# Altium PCB NBP9 Altera Cyclone BGA456 Rev1.00.PcbDoc (part 3 of 3)
Units mm, origin at the board's own origin, x right, y up, seen from the top; angles counter-clockwise.
Board outline 69 x 80.99 mm, 6 copper layers (Top Layer, MidLayer1, InternalPlane1, InternalPlane2, MidLayer2, Bottom Layer); 105 components, 269 nets, 899 pads, 453 vias.
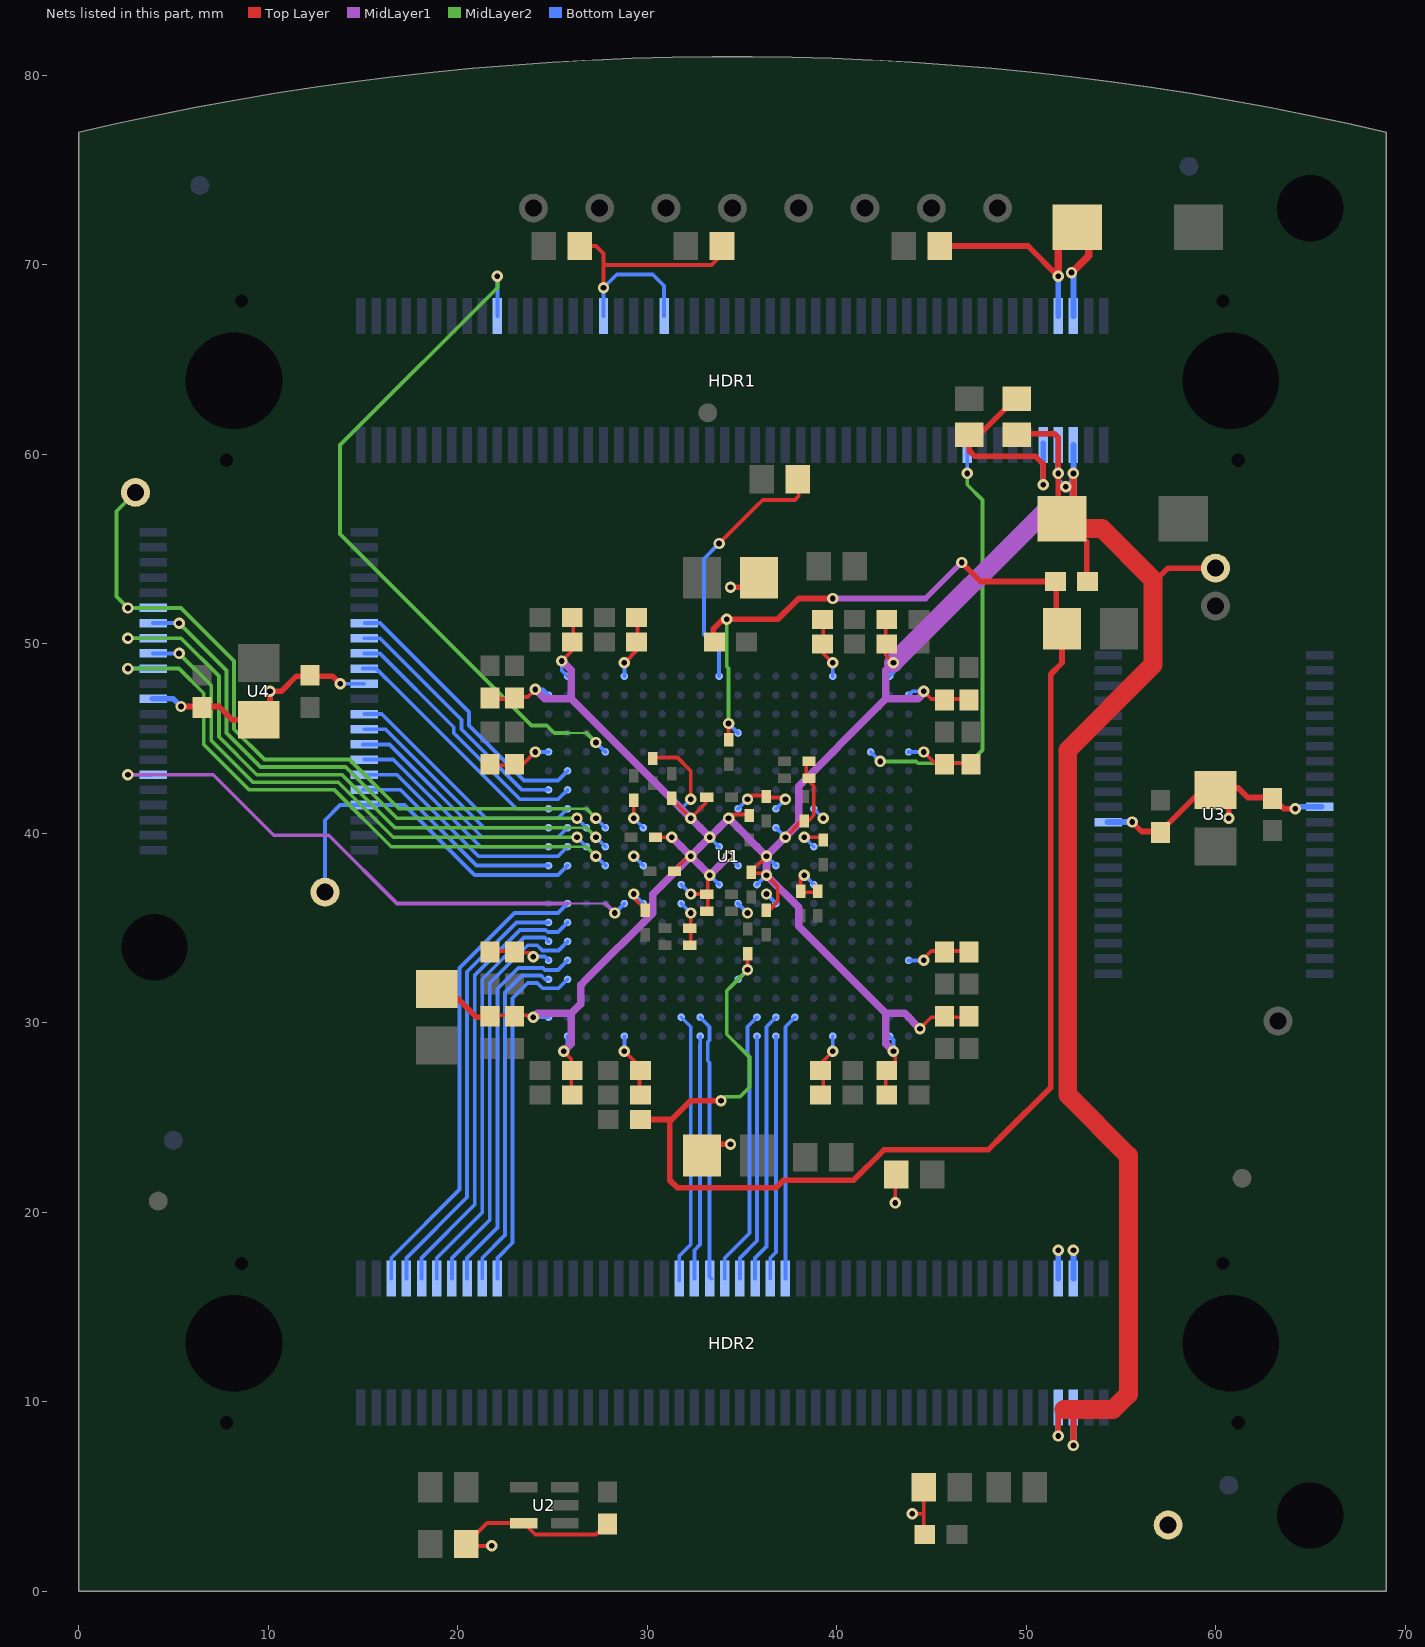
[diagram p7: the nets of this part, all layers, seen from the top]

## Via types
v1: diameter 0.6, hole 0.3, Top Layer to Bottom Layer, 453 vias

## Nets (pads, with @x,y where several pads share a name; then routed paths per layer and width w, separated by ;. In a path a pad name is that pad's centre, name@x,y a point inside that pad or via, vN(x,y) a via of type N, cw(c..) or ccw(c..) an arc to the next point about the centre after c; other vN are vias at no path point) (continued)
SRAM1_D4: U1.U10 U4.13 | length 32.4
  MidLayer2 w0.127: 25.8,39.3 26.8,39.3
  MidLayer2 w0.2: v1(2.6,48.7) 5.3,48.7 6.6,47.4 6.6,44.7 9,42.3 13.5,42.3 16.5,39.3 25.8,39.3 ; 26.8,39.3 v1(27.3,38.8)
  Bottom Layer w0.2: v1(2.6,48.7) U4.13@3.925,48.7 ; v1(27.3,38.8) U1.U10@27.8,38.3
SRAM1_D5: U1.V11 U4.14 | length 28.8
  MidLayer2 w0.2: v1(5.3,49.5) 7,47.8 7,44.9 9.2,42.7 13.7,42.7 16.6,39.8 v1(26.3,39.8)
  Bottom Layer w0.2: U4.14@3.925,49.5 v1(5.3,49.5) ; v1(26.3,39.8) U1.V11@26.8,39.3
SRAM1_D6: U1.U11 U4.15 | length 33.2
  MidLayer2 w0.127: 25.8,40.3 26.8,40.3
  MidLayer2 w0.2: v1(2.6,50.3) 5.4,50.3 7.4,48.3 7.4,45.1 9.4,43.1 13.9,43.1 16.7,40.3 25.8,40.3 ; 26.8,40.3 v1(27.3,39.8)
  Bottom Layer w0.2: v1(2.6,50.3) U4.15@3.9,50.3 ; v1@27.5,39.6 v1(27.3,39.8) U1.U11@27.8,39.3
SRAM1_D7: U1.V12 U4.16 | length 29.6
  MidLayer2 w0.2: v1(5.3,51.1) 7.8,48.6 7.8,45.3 9.6,43.5 14.1,43.5 16.8,40.8 v1(26.3,40.8)
  Bottom Layer w0.2: U4.16@3.925,51.1 v1(5.3,51.1) ; v1@26.5,40.6 v1(26.3,40.8) U1.V12@26.8,40.3
SRAM1_D8: U1.W15 U4.29 | length 14.8
  Bottom Layer w0.2: U4.29@15.1,51.1 15.9,51.1 20.6,46.4 20.6,45.7 23.5,42.8 25.3,42.8 U1.W15@25.8,43.3
SRAM1_D9: U1.Y14 U4.30 | length 13.3
  Bottom Layer w0.2: U4.30@15.075,50.3 15.9,50.3 20.2,46 20.2,45.5 23.4,42.3 24.375,42.3 ; 24.4,42.3 U1.Y14@24.8,42.3
SRAM1_D10: U1.W14 U4.31 | length 14.3
  Bottom Layer w0.2: U4.31@15.075,49.5 15.9,49.5 19.8,45.6 19.8,45.3 23.3,41.8 25.3,41.8 U1.W14@25.8,42.3
SRAM1_D11: U1.Y13 U4.32 | length 12.8
  Bottom Layer w0.2: U4.32@15,48.7 15.7,48.7 16.9,47.5 23.1,41.3 24.375,41.3 ; 24.4,41.3 U1.Y13@24.8,41.3
SRAM1_D12: U1.W13 U4.35 | length 13.2
  Bottom Layer w0.2: U4.35@15.075,46.3 16,46.3 21,41.3 21.5,40.8 25.3,40.8 25.499,41 U1.W13@25.8,41.3
SRAM1_D13: U1.Y12 U4.36 | length 11.9
  Bottom Layer w0.2: U4.36@15.075,45.5 16.2,45.5 21.4,40.3 24.375,40.3 ; 24.4,40.3 U1.Y12@24.8,40.3
SRAM1_D14: U1.W12 U4.37 | length 13
  Bottom Layer w0.2: U4.37@15,44.7 16.4,44.7 21.3,39.8 25.3,39.8 U1.W12@25.8,40.3
SRAM1_D15: U1.Y11 U4.38 | length 11.6
  Bottom Layer w0.2: U4.38@15.075,43.9 16.6,43.9 21.2,39.3 U1.Y11@24.8,39.3
SRAM1_E: U1.T8 U4.6 | length 30.7
  MidLayer1 w0.127: 25.8,36.3 27.8,36.3
  MidLayer1 w0.2: v1(2.6,43.1) 7.1,43.1 10.3,39.9 13.2,39.9 16.8,36.3 25.8,36.3 ; 27.8,36.3 v1(28.3,35.8)
  Bottom Layer w0.2: v1(2.6,43.1) U4.6@3.9,43.1 ; v1(28.3,35.8) U1.T8@28.8,36.3
SRAM1_LB: U1.W11 U4.39 | length 12.7
  Bottom Layer w0.2: U4.39@15.075,43.1 16.8,43.1 21.1,38.8 25.3,38.8 U1.W11@25.8,39.3
SRAM1_OE: TP2.1 U1.W10 U4.41 | length 18.7
  Bottom Layer w0.2: TP2.1@13,36.9 13,40.7 13.8,41.5 17.2,41.5 20.9,37.8 25.3,37.8 U1.W10@25.8,38.3
SRAM1_UB: U1.Y10 U4.40 | length 11.4
  Bottom Layer w0.2: U4.40@15,42.3 17,42.3 21,38.3 24.375,38.3 ; 24.4,38.3 U1.Y10@24.8,38.3
SRAM1_W: TP5.1 U1.U12 U4.17 | length 40.5
  MidLayer2 w0.127: 25.8,41.3 26.8,41.3
  MidLayer2 w0.2: TP5.1@3,58 2,57 2,52.5 v1(2.6,51.9) 5.4,51.9 8.2,49.1 8.2,45.5 9.8,43.9 14.3,43.9 16.9,41.3 25.8,41.3 ; 26.8,41.3 v1(27.3,40.8)
  Bottom Layer w0.2: v1(2.6,51.9) U4.17@3.9,51.9 ; v1@27.5,40.6 v1(27.3,40.8) U1.U12@27.8,40.3
SW0: HDR2.44 U1.N2 | length 14.4
  Bottom Layer w0.2: HDR2.44@31.7,16.4 31.7,17.7 32.3,18.3 32.3,29.8 U1.N2@31.8,30.3
SW1: HDR2.46 U1.M1 | length 13
  Bottom Layer w0.2: HDR2.46@32.5,16.5 32.5,18 32.8,18.3 32.8,28.875 ; 32.8,28.8 U1.M1@32.8,29.3
SW2: HDR2.48 U1.M2 | length 14.1
  Bottom Layer w0.2: U1.M2@32.8,30.3 33.3,29.8 33.3,29.1 33.2,29 33.2,28 33.3,27.9 33.3,16.6 33.35,16.55 HDR2.48@33.4,16.5
SW3: HDR2.50 U1.J2 | length 14.6
  Bottom Layer w0.2: HDR2.50@34.1,16.5 34.1,17.6 35.4,18.9 35.4,28.2 35.3,28.3 35.3,29.8 U1.J2@35.8,30.3
SW4: HDR2.52 U1.J1 | length 13.1
  Bottom Layer w0.2: HDR2.52@34.9,16.5 34.9,17.6 35.8,18.5 35.8,28.875 ; 35.8,28.9 U1.J1@35.8,29.3
SW5: HDR2.54 U1.H2 | length 14.3
  Bottom Layer w0.2: HDR2.54@35.7,16.5 35.7,17.6 36.3,18.2 36.3,29.8 U1.H2@36.8,30.3
SW6: HDR2.56 U1.H1 | length 13
  Bottom Layer w0.2: HDR2.56@36.5,16.5 36.5,17.6 36.8,17.9 36.8,28.875 ; 36.8,28.8 U1.H1@36.8,29.3
SW7: HDR2.58 U1.G2 | length 14
  Bottom Layer w0.2: HDR2.58@37.3,16.5 37.3,17.6 37.3,29.8 U1.G2@37.8,30.3
SWC0: HDR2.18 U1.Y4 | length 18.4
  Bottom Layer w0.2: HDR2.18@21.3,16.5 21.3,17.6 22.5,18.8 22.5,31.6 23.4,32.5 24.4,32.5 24.6,32.3 U1.Y4@24.8,32.3
SWC1: HDR2.16 U1.W5 | length 20.4
  Bottom Layer w0.2: HDR2.16@20.5,16.5 20.5,17.6 22.1,19.2 22.1,31.8 23.2,32.9 24.5,32.9 24.6,32.8 25.3,32.8 U1.W5@25.8,33.3
SWC2: HDR2.14 U1.W6 | length 21.7
  Bottom Layer w0.2: HDR2.14@19.7,16.5 19.7,17.6 21.7,19.6 21.7,32.1 23.7,34.1 24.2,34.1 24.475,33.825 25.325,33.825 U1.W6@25.8,34.3
SWC3: HDR2.6 U1.W8 | length 25
  Bottom Layer w0.2: HDR2.6@16.5,16.5 16.5,17.6 20.1,21.2 20.1,32.9 23,35.8 25.3,35.8 U1.W8@25.8,36.3
SWR0: HDR2.20 U1.W4 | length 18.7
  Bottom Layer w0.2: HDR2.20@22.1,16.5 22.1,17.6 22.9,18.4 22.9,31.3 23.7,32.1 24.2,32.1 24.475,31.825 25.325,31.825 U1.W4@25.8,32.3
SWR1: HDR2.12 U1.Y6 | length 21.3
  Bottom Layer w0.2: HDR2.12@18.9,16.5 18.9,17.6 21.3,20 21.3,32.3 23.5,34.5 24.6,34.5 U1.Y6@24.8,34.3
SWR2: HDR2.10 U1.W7 | length 23.3
  Bottom Layer w0.2: HDR2.10@18.1,16.5 18.1,17.6 20.9,20.4 20.9,32.5 23.3,34.9 24.656,34.9 24.756,34.8 25.3,34.8 U1.W7@25.8,35.3
SWR3: HDR2.8 U1.Y7 | length 22.9
  Bottom Layer w0.2: HDR2.8@17.3,16.5 17.3,17.6 20.5,20.8 20.5,32.7 23.1,35.3 24.375,35.3 ; 24.4,35.3 U1.Y7@24.8,35.3
TDO: R7.2 U1.L20 | length 15.7
  Top Layer w0.2: 35,56.5 v1(33.8,55.3) 35.7,57.2 36.1,57.6 37.8,57.6 38,57.8 R7.2@38,58.8
  Bottom Layer w0.2: U1.L20@33.8,48.3 33.8,49.7 33,50.5 33,54.5 v1(33.8,55.3) v1@33.8,55.4
TEST: HDR1.81 U1.C16 | length 23.2
  MidLayer2 w0.2: v1(42.3,43.8) 44.2,43.8 44.3,43.7 47,43.7 47.7,44.4 47.7,57.6 46.9,58.4 v1(46.9,59)
  Bottom Layer w0.2: U1.C16@41.8,44.3 v1(42.3,43.8) v1@42.101,43.999 ; v1(46.9,59) HDR1.81@46.9,60.5
VCC: C2.1 C3.1 C4.1 C5.1 C9.1 C10.1 C11.1 C12.1 C13.1 C14.1 C15.1 C16.1 C17.2 C28.1 C29.1 C30.1 C31.1 C32.1 C33.1 C34.1 C35.1 C36.1 C37.1 C38.1 C39.1 C40.1 C41.1 C42.1 C43.1 C44.1 C45.1 C46.1 C47.1 C48.1 C49.1 C51.1 HDR1.34 HDR1.42 HDR1.94 HDR1.96 HDR2.94 HDR2.96 R1.1 R2.1 R3.1 R10.1 R11.2 R12.2 TP3.1 U1.A5 U1.A16 U1.E1 U1.E20 U1.F9 U1.F11 U1.F13 U1.H8 U1.H13 U1.K8 U1.K13 U1.N8 U1.N13 U1.R8 U1.R10 U1.R12 U1.T1 U1.T20 U1.Y5 U1.Y16 U2.5 U3.11 U3.33 U4.11 U4.33 | length 133.1
  Top Layer w0.2: R11.2@20.45,2.5 21.55,3.6 U2.5@23.5,3.6 24.1,3 27.3,3 C17.2@27.9,3.6 ; R11.2@20.5,2.4 v1(21.8,2.4) ; C9.1@21.7,33.8 C34.1@23,33.8 ; C32.1@21.7,43.7 21.8,43.6 23,43.6 23.4,43.6 v1(24.1,44.3) ; C34.1@23,33.7 23.8,33.7 v1(24,33.5) ; R3.1@26.4,71 27.3,71 27.7,70.6 v1(27.7,68.8) ; 27.7,70 33.4,70 33.9,70.5 R2.1@33.9,71.1 ; v1@28.7,28.4 v1(28.8,28.5) 29.7,27.6 C41.1@29.7,27.5 ; v1@28.7,49.1 v1(28.8,49) 29.5,49.7 29.5,51.3 C15.1@29.2,51.6 ; v1(29.3,36.8) 29.3,36.6 C30.1@29.9,36 ; v1(29.3,40.8) C38.1@29.3,41.8 ; C37.1@29.6,26.2 C41.1@29.6,27.6 ; C31.1@30.2,44 31.6,44 32.3,43.3 v1(32.3,41.8) ; C13.1@32.3,34.1 v1(32.3,35.8) ; v1(35.3,41.8) 35.5,42 C36.1@36.3,42 ; C2.1@35.9,53.6 C2.1@36,53.6 ; C36.1@36.3,41.9 37.2,41.9 v1(37.3,41.8) ; v1(38.3,39.8) C44.1@39.3,39.8 ; v1@38.4,37.7 v1(38.3,37.8) 38.1,37.6 38.1,36.9 C47.1@39,36.9 ; C16.1@39.3,26.2 39.3,27.3 39.2,27.4 39.2,27.9 v1(39.8,28.5) v1@39.9,28.4 ; C33.1@39.3,50 39.3,49.5 v1(39.8,49) ; C33.1@39.3,50.1 C14.1@39.3,51.3 ; v1(43.1,20.5) R12.2@43.1,22 ; v1(44,4.1) 44.6,4.1 ; v1@44.5,33.3 45,33.8 C43.1@47,33.8 ; C29.1@44.6,2.9 R10.1@44.6,5.5 ; v1(44.6,44.3) 45.2,43.7 45.7,43.7 C11.1@47.1,43.7
  Top Layer w0.3: v1(5.4,46.7) 7.4,46.7 8.1,46 C4.1@9.5,46 10.1,46.6 v1(10.1,47.5) 10.7,47.5 11.5,48.3 13.4,48.3 v1(13.8,47.9) ; C3.1@32.8,23.6 v1(34.4,23.6) ; v1(34.4,53) 35.4,53 C2.1@35.9,53.5 ; R1.1@45.4,71 50.1,71 v1(51.7,69.4) ; v1(55.6,40.6) 56.1,40.1 57.1,40.1 59.4,42.4 61.2,42.4 61.7,41.9 63,41.9 63.6,41.3 v1(64.2,41.3) ; C5.1@60,42.4 60.7,41.7 v1(60.7,40.8)
  Top Layer w0.4: v1(51.7,69.4) 51.7,71.8 51.9,72 C51.1@53.3,72 ; v1(52.4,69.6) 53.3,70.5 C51.1@53.3,71.9
  Bottom Layer w0.2: v1(13.8,47.9) U4.33@15.075,47.9 ; v1(24,33.5) 24.6,33.5 U1.Y5@24.8,33.3 ; v1(24.1,44.3) U1.Y16@24.8,44.3 ; HDR1.34@27.7,67.3 v1(27.7,68.8) 28.4,69.5 30.3,69.5 30.9,68.9 HDR1.42@30.9,67.3 ; v1@28.8,28.6 U1.T1@28.8,29.3 ; U1.T20@28.8,48.3 v1(28.8,49) ; v1(29.3,36.8) U1.R8@29.8,36.3 ; v1(29.3,38.8) U1.R10@29.8,38.3 ; v1(29.3,40.8) U1.R12@29.8,40.3 ; U1.N8@31.8,36.3 v1(32.3,35.8) ; U1.N13@31.8,41.3 v1(32.3,41.8) ; U1.K13@34.8,41.3 v1(35.3,41.8) ; U1.K8@34.8,36.3 v1(35.3,35.8) ; v1(36.3,36.8) U1.H8@36.8,36.3 ; U1.H13@36.8,41.3 v1(37.3,41.8) ; v1(38.3,37.8) U1.F9@38.8,37.3 ; v1(38.3,39.8) U1.F11@38.8,39.3 ; U1.F13@38.8,41.3 v1(39.3,40.8) ; v1@39.8,28.6 U1.E1@39.8,29.3 ; U1.E20@39.8,48.3 v1(39.8,49) ; U1.A5@43.8,33.3 v1@44.5,33.3 ; U1.A16@43.8,44.3 v1(44.6,44.3)
  Bottom Layer w0.3: U4.11@3.9,47.1 5,47.1 v1(5.4,46.7) ; HDR2.94@51.7,16.5 v1(51.7,18) ; HDR1.94@51.7,67.3 v1(51.7,69.4) ; v1@52.4,69.5 v1(52.4,69.6) ; HDR2.96@52.5,16.5 v1(52.5,18) ; HDR1.96@52.5,67.3 v1@52.5,69.5 ; U3.11@54.3,40.6 v1(55.6,40.6) ; v1(64.2,41.3) 64.3,41.4 U3.33@65.6,41.4
  other v1: 44.6,33.3 51.7,69.4
VCCA_PLL1: C6.1 C52.1 C53.1 C54.1 C55.1 L1.2 U1.K4 U1.K17 | length 95.6
  Top Layer w0.2: C54.1@34.3,45 v1(34.3,45.8) ; v1(35.3,32.8) C55.1@35.3,33.6
  Top Layer w0.3: C53.1@29.65,24.9 31.3,24.9 ; C52.1@33.5,50 33.5,50.8 34,51.3 36.9,51.3 38,52.4 v1(39.8,52.4) ; v1(33.9,25.9) 32.3,25.9 31.2,24.8 31.2,21.7 31.6,21.3 36.8,21.3 37.2,21.7 40.9,21.7 42.5,23.3 48,23.3 48.8,24.1 51.3,26.6 51.3,48.4 51.9,49 C6.1@51.9,50.8 ; v1(46.6,54.3) 47.6,53.3 51.6,53.3 51.6,51.3 C6.1@52,50.9
  MidLayer1 w0.3: v1(39.8,52.4) 44.7,52.4 v1(46.6,54.3)
  MidLayer2 w0.2: v1(33.9,25.9) 34.1,26.1 34.9,26.1 35.4,26.6 35.4,28.2 34.2,29.4 34.2,31.7 34.4,31.9 v1(35.3,32.8) ; v1(34.2,51.3) 34.2,50.7 34.2,48.8 34.3,48.7 v1(34.3,45.8)
  Bottom Layer w0.2: v1(34.3,45.8) U1.K17@34.8,45.3 ; U1.K4@34.8,32.3 v1(35.3,32.8)
VCCINT: C1.1 C7.1 C8.1 C18.1 C19.1 C20.1 C21.1 C22.1 C23.1 C24.1 C25.1 C26.1 C27.1 C50.1 C56.1 C57.1 C58.1 C59.1 C60.1 C61.1 C62.1 C63.1 C64.1 C65.1 C66.1 C67.1 C68.1 C69.1 C70.1 C71.1 HDR1.93 HDR1.95 HDR2.93 HDR2.95 L1.1 R8.1 TP6.1 U1.A2 U1.A19 U1.B1 U1.B20 U1.H10 U1.H12 U1.J9 U1.J11 U1.K10 U1.K12 U1.L9 U1.L11 U1.M10 U1.M12 U1.N9 U1.N11 U1.W1 U1.W20 U1.Y2 U1.Y19 | length 224.5
  Top Layer w0.2: C63.1@21.7,30.4 23.9,30.4 v1(24,30.3) ; C58.1@21.7,47.2 21.8,47.1 C67.1@23,47.1 ; C67.1@23,47.2 23.7,47.2 v1(24.1,47.6) ; v1(25.5,49.1) 26.1,49.7 26.1,51.3 C59.1@25.9,51.5 ; v1(25.6,28.5) 26,28.1 C57.1@26,26.3 ; C21.1@30.4,39.8 v1(31.3,39.8) ; C8.1@31.3,41.9 31.3,41.8 v1(32.3,40.8) 33.1,41.6 C24.1@33.1,41.8 ; C27.1@31.4,38 32.2,38.8 v1(32.3,38.8) ; v1(32.3,36.8) C7.1@33.2,36.8 ; C23.1@33.2,35.9 C7.1@33.2,36.8 ; v1(33.3,37.8) 33.2,37.7 C7.1@33.2,36.8 ; v1(34.3,40.8) 34.5,41 C20.1@35.3,41 ; C26.1@35.5,37.9 36.2,37.9 v1(36.3,37.8) 36.9,37.2 36.9,36.4 36.4,35.9 C22.1@36.3,35.9 ; C26.1@35.5,38 v1(36.3,38.8) ; v1(37.3,39.8) 38.1,40.6 C18.1@38.3,40.6 ; C18.1@38.2,40.7 38.54,40.7 38.8,40.96 38.8,42.5 38.4,42.9 C19.1@38.4,43.8 ; C62.1@42.6,26.2 C65.1@42.6,27.6 ; C56.1@42.7,51.4 42.6,51.3 42.6,49.4 v1(43,49) ; v1(43,28.5) 43.1,28.4 C65.1@43.1,27.5 ; v1(44.4,29.7) 45,30.3 C61.1@47,30.3 ; v1(44.6,47.5) 45,47.1 C60.1@47,47.1
  Top Layer w0.3: C1.1@18.9,31.8 19.5,31.8 21,30.3 C63.1@21.7,30.3 ; R8.1@49.5,61.1 51.5,61.1 51.7,60.9 C50.1@51.7,56.6 ; v1(51.7,8.2) 51.7,9.6 ; v1(52.5,7.7) 52.5,9.6 ; C50.1@52.5,57.2 v1(52.5,59) ; L1.1@53.2,53.3 53.2,55.4 ; 56.6,53.1 57.5,54 TP6.1@60,54
  Top Layer w1: C50.1@51.9,56.1 54,56.1 56.7,53.4 56.7,48.9 52.2,44.4 52.2,26.2 55.4,23 55.4,13.8 ; 52,9.6 54.6,9.6 55.4,10.4 55.4,14
  MidLayer1 w0.2: 51.7,58.7 v1(51.7,59)
  MidLayer1 w0.4: v1(24,30.3) 24.2,30.5 26,30.5 ; v1(24.1,47.6) 24.6,47.1 26,47.1 ; v1(25.5,49.1) 26,48.6 26,47.1 ; v1(25.6,28.5) 26,28.9 26,30.5 ; v1(31.3,39.8) v1(32.3,38.8) ; v1(34.3,38.8) v1(33.3,37.8) v1(32.3,38.8) ; v1(43,28.5) 42.6,28.9 42.6,30.5 ; v1(43,49) 42.6,48.6 42.6,47.1 ; v1(44.4,29.7) 43.6,30.5 42.6,30.5 ; v1@44.65,47.45 44.3,47.1 42.6,47.1 ; 52.5,57.3 v1(52.5,59) ; 26,30.5 26.5,31 26.5,32 26.8,32.3 30.3,35.8 30.3,36.8 v1(32.3,38.8) ; 26,47.1 v1(33.3,39.8) ; v1(32.3,38.8) v1(33.3,39.8) ; v1(33.3,39.8) v1(34.3,40.8) v1(36.3,38.8) ; v1(36.3,38.8) v1(36.3,37.8) 38,36.1 38,35.1 42.6,30.5 ; v1(36.3,38.8) v1(37.3,39.8) 38,40.5 38,42.5 42.2,46.7 42.6,47.1
  MidLayer1 w1: v1(43,49) 51.3,57.3 52.5,57.3
  Bottom Layer w0.2: v1(24,30.3) U1.Y2@24.8,30.3 ; v1(24.1,47.6) 24.5,47.6 U1.Y19@24.8,47.3 ; v1(25.5,49.1) 25.5,48.6 U1.W20@25.8,48.3 ; v1@25.65,28.45 25.8,28.6 U1.W1@25.8,29.3 ; v1(31.3,39.8) U1.N11@31.8,39.3 ; U1.N9@31.8,37.3 v1(32.3,36.8) ; v1(32.3,38.8) U1.M10@32.8,38.3 ; v1(32.3,40.8) U1.M12@32.8,40.3 ; v1(33.3,37.8) U1.L9@33.8,37.3 ; v1(33.3,39.8) U1.L11@33.8,39.3 ; v1(34.3,38.8) U1.K10@34.8,38.3 ; v1(34.3,40.8) U1.K12@34.8,40.3 ; U1.J9@35.8,37.3 v1(36.3,37.8) ; U1.J11@35.8,39.3 v1(36.3,38.8) U1.H10@36.8,38.3 ; U1.H12@36.8,40.3 v1(37.3,39.8) ; U1.B1@42.8,29.3 43,29.1 v1(43,28.5) ; U1.B20@42.8,48.3 43,48.5 v1(43,49) ; U1.A2@43.8,30.3 v1(44.4,29.7) ; U1.A19@43.8,47.3 44,47.5 v1(44.6,47.5) ; v1(51.7,59) 51.7,58.7 v1(52.1,58.3) 52.5,58.7 v1(52.5,59)
  Bottom Layer w0.3: v1(51.7,8.2) HDR2.93@51.7,9.7 ; v1(51.7,59) HDR1.93@51.7,60.5 ; v1(52.5,7.7) HDR2.95@52.5,9.7 ; v1(52.5,59) HDR1.95@52.5,60.5
VDRIVE: HDR1.20 U1.U16 | length 38.2
  MidLayer2 w0.127: 25.8,45.3 26.8,45.3
  MidLayer2 w0.2: v1(22.1,69.4) 22.1,68.8 14.3,61 13.8,60.5 13.8,55.8 23.9,45.7 24.7,45.7 25.1,45.3 25.8,45.3 ; 26.8,45.3 v1(27.3,44.8)
  Bottom Layer w0.2: HDR1.20@22.1,67.3 v1(22.1,69.4) ; v1@27.5,44.6 v1(27.3,44.8) U1.U16@27.8,44.3
VREF: HDR1.91 R8.2 R9.1 | length 11.7
  Top Layer w0.3: R8.2@49.5,63 49.475,62.975 47.6,61.1 47,61.1 47,60.2 47.3,59.9 50.5,59.9 50.9,59.5 v1(50.9,58.4)
  Bottom Layer w0.3: v1(50.9,58.4) HDR1.91@50.9,60.6
pads on no net: HDR1.MH1 HDR1.MH2 HDR1.MH3 HDR1.MH4 HDR1.MH5 HDR1.MH6 HDR2.MH1 HDR2.MH2 HDR2.MH3 HDR2.MH4 HDR2.MH5 HDR2.MH6 U1.B3 U1.C4 U1.C6 U1.D3 U1.D17 U1.D18 U1.E12 U1.E16 U1.F6 U1.F8 U1.F10 U1.F12 U1.F14 U1.F15 U1.G7 U1.G14 U1.G15 U1.H7 U1.H14 U1.H15 U1.J6 U1.J7 U1.J8 U1.J13 U1.J14 U1.J16 U1.K2 U1.K15 U1.K16 U1.K19 U1.L2 U1.L4 U1.L8 U1.L13 U1.M6 U1.M7 U1.M8 U1.M13 U1.M14 U1.M15 U1.N6 U1.N7 U1.N14 U1.N15 U1.P6 U1.P7 U1.P14 U1.P15 U1.P16 U1.R7 U1.R9 U1.R11 U1.R13 U1.R14 U1.R15 U1.R16 U1.V14 U2.1

## Polygon pours and split planes (outlines as drawn)
GND on Top Layer "Top Layer-GND" (solid, remove dead copper, pour order 1000): 0,0 0,82.9 69,82.9 69,0
VCCINT on MidLayer1 "MidLayer1-VCCINT" (solid, remove dead copper, pour order 1001): 0,0 0,82.7 69,82.7 69,0.1 0,0.1
VCC on MidLayer2 "MidLayer2-VCC" (solid, remove dead copper, pour order 1002): 0,0 0,83.4 69,83.4 69,0
GND on Bottom Layer "Bottom Layer-GND" (solid, remove dead copper, pour order 1003): 0,0 0,83.2 69,83.2 69,0
VCC on InternalPlane1 (split plane): 36.232,80.189 37.965,80.159 39.696,80.109 41.427,80.039 43.158,79.949 44.887,79.839 46.614,79.709 48.34,79.559 50.064,79.389 51.786,79.2 53.506,78.99 55.223,78.761 56.938,78.511 58.649,78.242 60.358,77.953 62.062,77.645 63.763,77.317 65.461,76.969 67.154,76.602 68.197,76.363 68.197,0.803 0.803,0.803 0.803,76.363 1.846,76.602 3.539,76.969 5.237,77.317 6.938,77.645 8.642,77.953 10.351,78.242 12.062,78.511 13.777,78.761 15.494,78.99 17.214,79.2 18.936,79.389 20.66,79.559 22.386,79.709 24.113,79.839 25.842,79.949 27.573,80.039 29.304,80.109 31.035,80.159 32.768,80.189 34.5,80.199
GND on InternalPlane2 (split plane): 36.232,80.189 37.965,80.159 39.696,80.109 41.427,80.039 43.158,79.949 44.887,79.839 46.614,79.709 48.34,79.559 50.064,79.389 51.786,79.2 53.506,78.99 55.223,78.761 56.938,78.511 58.649,78.242 60.358,77.953 62.062,77.645 63.763,77.317 65.461,76.969 67.154,76.602 68.197,76.363 68.197,0.803 0.803,0.803 0.803,76.363 1.846,76.602 3.539,76.969 5.237,77.317 6.938,77.645 8.642,77.953 10.351,78.242 12.062,78.511 13.777,78.761 15.494,78.99 17.214,79.2 18.936,79.389 20.66,79.559 22.386,79.709 24.113,79.839 25.842,79.949 27.573,80.039 29.304,80.109 31.035,80.159 32.768,80.189 34.5,80.199

## Keep-outs
Top Layer:
  circle w0.254: c4.2,20.6 r2.5
  circle w0.254: c33.2,62.2 r2.5
  circle w0.254: c61.4,21.8 r2.5
Bottom Layer:
  circle w0.254: c5,23.8 r2.5
  circle w0.254: c58.6,75.2 r2.5
  circle w0.254: c6.4,74.2 r2.5
  circle w0.254: c60.7,5.6 r2.5
Keep-Out Layer:
  the board outline again, w1.8

## Silkscreen, mask and mechanical layers (free items; w line width, h text height)
Top Overlay:
  circle w0.127: c4,34 r2.5
  circle w0.127: c65,4 r2.5
  circle w0.127: c65,73 r2.5
  lines w0.08: 20,27.1 21.4,28 ; 21.5,50.5 23,49.6 ; 22.7,27.4 22.7,28 ; 22.7,51.8 23.7,50.4 ; 23.2,25.4 23.6,25.8 23.6,27.6 23.8,27.6 ; 25.5,37.3 32.4,37.3 ; 26.1,38.3 29.7,38 ; 26.1,39.4 28.5,39.4 28.8,39.6 ; 26.2,42.3 29.1,42.3 ; 29.8,30.7 29.8,34.2 ; 29.9,23.2 29.9,24.3 ; 30.8,30.6 30.7,33.4 31.6,33.9 31.6,35.4 32.1,35.8 ; 31.8,30.6 31.8,33.8 31.9,33.9 ; 33,42.5 33.2,42.2 ; 33.1,35 33.7,34.6 33.7,30 ; 33.2,46.9 33.8,45.9 ; 33.2,51.3 33.8,50.7 ; 34.8,46.9 34.9,41.6 35.2,41.2 ; 35.6,33.8 35.8,33.7 35.8,30.6 ; 35.8,46.9 35.8,42.6 36,42.2 ; 36.5,35.5 37.4,35.2 ; 38.1,36.6 38.2,36.3 42.5,36.2 ; 38.5,41.3 42.6,41.3 ; 39.4,37.2 42.5,37.4 ; 39.5,43 39.9,43.3 42.5,43.3 ; 39.6,39.3 42.6,39.3 ; 44.9,50 46.6,51.1 ; 45,27.4 45.9,26.6 ; 45.7,49.6 46.2,50 47.4,50.2 ; 45.9,28 47.1,27.4 ; 46.1,63.4 46.1,64 ; 55.8,74.4 55.82,75.12 ; 57.9,2.6 58.8,1.7 61.5,1.7
  lines w0.127: 0,1.5 1.5,1.5 1.5,0 ; 0,22.3 1.5,22.3 1.5,23.4 0,23.4 ; 0.001,53.6 1.501,53.6 1.501,54.7 0.001,54.7 ; 0,75.5 1.5,75.5 1.5,77.3 ; 15.7,79.8 15.7,78.1 17,78.1 17,79.9 ; 49.7,80.2 49.7,78.7 51,78.7 51,80.1 ; 67.5,0 67.5,1.5 69,1.5 ; 67.5,77.3 67.5,75.5 69,75.5 ; 68.999,22.3 67.5,22.3 67.5,23.4 69,23.4
Bottom Overlay:
  drawing of 856 lines, arcs and shapes, not listed
  text "REV 1.00" at 47.8,76.5 h1.3
  text "NBP9" at 54.5,76.5 h1.3
  text "TP10" at 25.3,71.2 h0.8
  text "TP12" at 28.9,71.2 h0.8
  text "TP9" at 31.9,71.2 h0.8
  text "TP8" at 35.5,71.2 h0.8
  text "TP7" at 39.1,71.2 h0.8
  text "TP14" at 42.8,71.2 h0.8
  text "TP13" at 46.5,71.2 h0.8
  text "TP11" at 49.8,71.2 h0.8
  text "TP5" at 4.1,59.1 h0.8
  text "1" at 14.4,58.4 h1
  text "TP6" at 63.4,53.6 h0.8
  text "TP4" at 59,51.6 h0.8
  text "TP2" at 14.2,34.9 h0.8
  text "TP1" at 62.1,29.7 h0.8
  text "1" at 14.224,7.62 h1
  text "TP3" at 55.9,3.1 h0.8
PCB Boundary:
  the board outline again, w0.25
  text "PCB boundary coincides with centre-line of tracks and arc" at 0,-12 h0.75
Gerber ID:
  text ".Layer_Name" at 0,-6 h0.75
Printout ID:
  text ".Printout_Name" at 0,-10 h0.75
Design Information:
  drawing of 719 lines, arcs and shapes, not listed
  text "NBP9 REV 1.00" at 317.627,202.041 h1.27
  text "DESIGN INFORMATION" at 261.62,201.914 h1.52
  text "BOARD NAME:" at 299.212,201.914 h1.52
  text "BOARD TECHNOLOGY" at 261.62,199.374 h1.52
  text "BOARD SIZE (REFER ALSO PROFILING INFORMATION)" at 309.88,199.374 h1.27
  text "69.00mm" at 312.6,197.1 h1.52
  text "15.748" at 277.419,197.012 h1.52
  text "81.00mm" at 335.6,197 h1.52
  text "5.000" at 291.389,196.885 h1.52
  text "5" at 266.446,196.834 h1.52
  text "X" at 328.549,196.326 h1.78
  text "(MIN. TRACK/   PADS  /   CLEARANCE     IN 0.001'')" at 260.096,194.294 h1.27
  text "MINIMUM ANNULAR RING 0.05MM (0.002'') EXTERNAL PER IPC-2221 CLASS 3 LEVEL C AND IS THE" at 261.62,191.754 h1.27
  text "MANUFACTURING REGISTRATION ALLOWANCE" at 261.62,189.468 h1.27
  text "LAND SIZE CALCULATION MINIMUM - NOMINAL HOLE SIZE + 0.508MM (0.020'')" at 261.62,186.674 h1.27
  text "AS INSTRUCTED" at 347.65,182.28 h1.52
  text "X" at 299.263,182.153 h1.52
  text "CIRCUIT TYPE:" at 261.62,182.102 h1.52
  text "SS" at 284.48,182.102 h1.27
  text "DS" at 302.26,182.102 h1.27
  text "X" at 316.865,182.102 h1.52
  text "PTH" at 320.04,182.102 h1.27
  text "ML" at 330.962,182.102 h1.27
  text "X" at 334.772,182.102 h1.52
  text "No. OFF" at 337.82,182.102 h1.27
  text "FINGER CONNECTOR DIM PER:" at 261.62,179.054 h1.52
  text "AS SHOWN" at 337.82,179.054 h1.27
  text "No. OFF TOTAL" at 278.384,176.26 h1.52
  text "ONE SIDE" at 320.04,176.26 h1.27
  text "BOTH SIDES" at 337.82,176.006 h1.27
  text "VIAS:" at 261.62,173.339 h1.52
  text "NONE" at 273.05,173.339 h1.14
  text "X" at 281.432,173.339 h1.52
  text "FEED THRU'" at 284.48,173.339 h1.14
  text "X" at 299.212,173.339 h1.52
  text "TENTED" at 302.26,173.339 h1.14
  text "BURIED LAYER SEQUENCE" at 320.04,173.339 h1.14
  text "UNIQUE DRILL" at 284.48,170.291 h1.14
  text "2 SIZE" at 302.26,170.291 h1.14
  text "BLIND LAYER SEQUENCE" at 320.04,170.291 h1.14
  text "Layer Stack Manager (Protel)" at 297.053,168.005 h1.27
  text "X" at 334.772,168.005 h1.52
  text "AS SHOWN" at 337.82,168.005 h1.27
  text "LAYER CONSTRUCTION PER:" at 261.62,167.878 h1.52
  text "Protel" at 342.646,165.338 h1.27
  text "(PFW)" at 352.933,165.211 h1.27
  text "ARTWORK:" at 261.62,165.084 h1.52
  text "MANUAL" at 284.48,165.084 h1.27
  text "DIGITISED" at 302.26,165.084 h1.27
  text "X" at 316.992,165.084 h1.52
  text "CAD" at 320.04,165.084 h1.27
  text "TYPE" at 330.962,165.084 h1.27
  text "ARTWORK/PATTERN MASTER LIST" at 261.62,160.385 h1.52
  text "DESCRIPTION" at 262.89,157.972 h1.27
  text "DRAWING No./CAD FILE REF." at 281.559,157.972 h1.27
  text "LAYER NAME" at 322.834,157.972 h1.27
  text "GERBER FILE REF" at 343.586,157.896 h1.27
  text "PCB FILE" at 261.366,155.432 h1.27
  text "SpartanIIIBGA456" at 281.737,155.356 h1.27
  text "PcbDoc" at 312.979,155.356 h1.02
  text "Top Paste Mask" at 321.158,152.892 h1.02
  text "GTP" at 363.779,152.816 h1.27
  text "GERBER FILE" at 261.366,152.765 h1.27
  text "GTO" at 363.728,150.327 h1.27
  text "Top Overlay" at 321.158,150.301 h1.02
  text "GERBER FILE" at 261.366,150.225 h1.27
  text "Top Solder Mask" at 321.158,147.863 h1.02
  text "GTS" at 363.779,147.736 h1.27
  text "GERBER FILE" at 261.366,147.685 h1.27
  text "TOP LAYER" at 321.158,145.272 h1.02
  text "GTL" at 363.779,145.196 h1.27
  text "GERBER FILE" at 261.366,145.145 h1.27
  text "G1" at 363.728,142.834 h1.27
  text "MIDLAYER1" at 321.158,142.732 h1.02
  text "GERBER FILE" at 261.366,142.605 h1.27
  text "INTERNALPLANE1" at 321.158,140.192 h1.02
  text "GP1" at 363.779,140.116 h1.27
  text "GERBER FILE" at 261.366,140.065 h1.27
  text "INTERNALPLANE2" at 321.158,137.652 h1.02
  text "GP2" at 363.728,137.627 h1.27
  text "GERBER FILE" at 261.366,137.525 h1.27
  text "MIDLAYER2" at 321.158,135.112 h1.02
  text "G2" at 363.728,135.087 h1.27
  text "GERBER FILE" at 261.366,134.985 h1.27
  text "BOTTOMLAYER" at 321.158,132.572 h1.02
  text "GBL" at 363.779,132.496 h1.27
  text "GERBER FILE" at 261.366,132.445 h1.27
  text "Bottom Solder Mask" at 321.158,130.083 h1.02
  text "GBS" at 363.779,129.956 h1.27
  text "GERBER FILE" at 261.366,129.905 h1.27
  text "Bottom Overlay" at 321.158,127.492 h1.02
  text "GBO" at 363.779,127.416 h1.27
  text "GERBER FILE" at 261.366,127.365 h1.27
  text "Bottom Paste Mask" at 321.158,125.003 h1.02
  text "GBP" at 363.779,124.876 h1.27
  text "GERBER FILE" at 261.366,124.825 h1.27
  text "PCB Boundary" at 321.158,122.412 h1.02
  text "GM1" at 363.779,122.336 h1.27
  text "GERBER FILE" at 261.366,122.285 h1.27
  text "APERTURE LIST" at 261.366,119.872 h1.27
  text "APR" at 313.979,119.796 h1.27
  text "DRILL REPORT" at 261.366,117.332 h1.27
  text "DRR" at 313.979,117.256 h1.27
  text "EXCELLON DRILL" at 261.366,114.792 h1.27
  text "TXT" at 313.979,114.716 h1.27
  text "MATERIAL:" at 261.62,99.298 h1.52
  text "GLASS FIBRE EPOXY RESIN NEMA GRADE FR4 (MIL-S-13949H)" at 287.274,99.044 h1.27
  text "X" at 284.607,98.917 h1.52
  text "THICKNESS:" at 269.494,96.123 h1.27
  text "0.8mm" at 287.274,96.123 h1.27
  text "1.2mm" at 304.927,96.123 h1.27
  text "1.6mm" at 322.58,96.123 h1.27
  text "2.4mm" at 340.36,96.123 h1.27
  text "3.2mm" at 358.14,96.123 h1.27
  text "X" at 320.167,95.996 h1.52
  text "TOLERANCE:" at 269.367,93.075 h1.27
  text "IN A/W IPC-D-300G CLASS" at 287.02,93.075 h1.27
  text "3 LEVEL B" at 321.945,93.075 h1.27
  text "OTHER +/-" at 340.36,93.075 h1.27
  text "X" at 284.607,92.948 h1.52
  text "BOW & TWIST:" at 266.954,90.027 h1.27
  text "IN A/W IPC-D-300G CLASS" at 287.02,90.027 h1.27
  text "3 LEVEL B" at 321.945,90.027 h1.27
  text "AS SHOWN" at 340.487,89.9 h1.27
  text "X" at 284.607,89.773 h1.52
  text "COPPER THICKNESS (FINISHED)" at 269.367,86.725 h1.27
  text "OUTER:" at 274.193,84.439 h1.27
  text "18um" at 287.274,84.439 h1.27
  text "35um" at 314.325,84.439 h1.27
  text "70um" at 340.614,84.439 h1.27
  text "X" at 311.582,84.236 h1.52
  text "INNER SIGNAL:" at 265.811,81.391 h1.27
  text "18um" at 287.274,81.391 h1.27
  text "35um" at 314.325,81.391 h1.27
  text "70um" at 340.614,81.391 h1.27
  text "X" at 311.531,81.188 h1.52
  text "INNER PWR:" at 269.494,78.343 h1.27
  text "18um" at 287.274,78.343 h1.27
  text "35um" at 314.325,78.343 h1.27
  text "70um" at 340.614,78.343 h1.27
  text "X" at 311.658,78.216 h1.52
  text "STRUCTURE:" at 261.62,75.295 h1.52
  text "REFER" at 287.274,75.295 h1.27
  text "AS PER DRAWING No." at 287.147,72.12 h1.27
  text "AS SHOWN" at 340.487,72.12 h1.27
  text "X" at 337.947,71.993 h1.52
  text "DRILLING:" at 261.62,69.326 h1.52
  text "VIEWED FROM:" at 266.573,67.04 h1.27
  text "COMPONENT SIDE" at 287.274,67.04 h1.14
  text "SOLDER SIDE" at 314.071,67.04 h1.14
  text "X" at 284.607,66.786 h1.52
  text "REFERENCE:" at 268.859,63.992 h1.27
  text "AS SHOWN" at 287.147,63.865 h1.14
  text "PATTERN MASTER LIST" at 314.198,63.865 h1.14
  text "X" at 337.947,63.865 h1.52
  text "NC_DRILL FILES" at 340.487,63.865 h1.14
  text "X" at 284.607,63.738 h1.52
  text "PTH MINIMUM COPPER THICKNESS:" at 274.701,60.944 h1.27
  text "20um" at 314.325,60.944 h1.27
  text "X" at 311.658,60.817 h1.52
  text "OTHER" at 340.487,60.817 h1.27
  text "NPTH:" at 275.209,57.896 h1.27
  text "TENTED" at 287.147,57.769 h1.14
  text "X" at 311.658,57.769 h1.52
  text "PADS REMOVED" at 314.198,57.769 h1.14
  text "REMOVE PADS" at 340.487,57.769 h1.14
  text "X" at 284.607,57.642 h1.52
  text "2nd DRILL" at 287.147,54.721 h1.14
  text "BOTH" at 314.198,54.721 h1.14
  text "AS SHOWN" at 326.517,54.721 h1.14
  text "NONE" at 340.487,54.721 h1.14
  text "BOARD FINISH:" at 261.62,51.8 h1.52
  text "X" at 284.607,51.673 h1.52
  text "ETCHING" at 287.147,51.673 h1.14
  text "REFER PATTERN MASTER LIST" at 314.198,51.673 h1.14
  text "LEGEND / SCREEN PRINT:" at 281.94,48.752 h1.27
  text "NONE" at 314.198,48.625 h1.14
  text "COMPONENT" at 326.517,48.625 h1.14
  text "SOLDER" at 340.487,48.625 h1.14
  text "X" at 323.977,48.498 h1.52
  text "X" at 337.947,48.498 h1.52
  text "COLOUR:" at 272.161,45.704 h1.27
  text "WHITE" at 287.147,45.577 h1.14
  text "YELLOW" at 314.198,45.577 h1.14
  text "OTHER" at 340.487,45.577 h1.14
  text "X" at 284.607,45.45 h1.52
  text "X" at 284.607,42.529 h1.52
  text "LIQUID PHOTOIMAGEABLE" at 287.147,42.529 h1.14
  text "SCREEN PRINT" at 326.517,42.529 h1.14
  text "MATTE" at 287.147,39.481 h1.14
  text "GLOSS" at 299.847,39.481 h1.14
  text "GREEN" at 314.198,39.481 h1.14
  text "BLUE" at 326.517,39.481 h1.14
  text "G/Y" at 340.487,39.481 h1.14
  text "OTHER" at 351.917,39.481 h1.14
  text "X" at 297.18,39.354 h1.52
  text "SOLDER MASK COLOUR:" at 261.62,36.56 h1.14
  text "BLACK" at 287.147,36.433 h1.14
  text "GREEN" at 299.847,36.433 h1.14
  text "YELLOW" at 314.198,36.433 h1.14
  text "BLUE" at 326.517,36.433 h1.14
  text "OTHER" at 340.487,36.433 h1.14
  text "X" at 284.48,36.306 h1.52
  text "TRACK FINISH:" at 261.62,33.512 h1.52
  text "X" at 284.607,33.385 h1.52
  text "SELECTIVE SOLDER (HASL)" at 287.147,33.385 h1.14
  text "REFLOW SOLDER" at 326.517,33.385 h1.14
  text "SELECTIVE GOLD" at 287.147,30.337 h1.14
  text "um  (AREA" at 314.198,30.337 h1.14
  text "sq. mm)" at 342.011,30.337 h1.14
  text "REFER PATTERN MASTER LIST" at 287.147,27.289 h1.14
  text "OTHER" at 326.517,27.289 h1.14
  text "EDGE BOARD" at 261.62,24.368 h1.52
  text "1.3um HARD GOLD OVER 5um     NICKEL / TIN-NICKEL" at 287.147,24.241 h1.14
  text "CONTACTS:" at 261.62,22.209 h1.52
  text "HARD FINISH GOLDE PLATE" at 287.147,21.193 h1.14
  text "OTHER" at 326.517,21.193 h1.14
  text "AS SHOWN" at 287.147,18.145 h1.14
  text "REFER" at 326.517,18.145 h1.14
  text "PROFILING:" at 261.62,15.097 h1.52
  text "AS DIMENSIONED, MEASURED AND CUT FROM SPECIFIED DATUM." at 287.147,15.097 h1.14
  text "X" at 284.607,14.97 h1.52
  text "REFER PCB BLANK DWG No." at 287.274,12.176 h1.27
  text "USE PROFILE / ROUTE TAPE SUPPLIED (REFER PATTERN MASTER LIST)" at 287.274,9.128 h1.27
  text "SQUARE CUT" at 287.274,6.08 h1.27
  text "N.C. ROUTE" at 305.054,6.08 h1.27
  text "V. SCORE" at 322.834,6.08 h1.27
  text "BLANK" at 340.614,6.08 h1.27
  text "ACCEPTABILITY:" at 261.62,3.413 h1.52
  text "MATERIALS AND WORKMANSHIP FOR ALL PRINTED WIRING BOARDS TO MEET" at 283.845,3.286 h1.27
  text "OR EXCEED THE REQUIREMENTS OF:" at 283.845,0.492 h1.27
  text "IPC-6011/12 AND IPC-A-600E" at 287.401,-2.175 h1.27
  text "1" at 322.961,-2.175 h1.27
  text "2" at 331.851,-2.175 h1.27
  text "X" at 329.184,-2.302 h1.52
  text "X" at 284.734,-2.429 h1.52
  text "3" at 340.741,-4.334 h1.27
  text "UL CERTIFICATION" at 287.401,-5.223 h1.27
  text "AUSTEL" at 322.961,-5.223 h1.27
  text "X" at 284.734,-5.35 h1.52
  text "ML-P-55110F GRP" at 286.893,-8.271 h1.02
  text "A" at 305.181,-8.271 h1.27
  text "B" at 314.071,-8.271 h1.27
  text "AS2546" at 322.961,-8.271 h1.27
  text "OTHER" at 340.741,-8.271 h1.27
  text "ADDITIONAL" at 261.62,-11.192 h1.52
  text "NONE" at 287.401,-11.446 h1.27
  text "SAMPLE PLAN" at 305.181,-11.446 h1.27
  text "MIL-P-55110E SERIAL Nos. PER ORDER" at 322.961,-11.446 h1.27
  text "REQUIREMENTS:" at 261.62,-13.605 h1.52
  text "NONE" at 287.401,-14.494 h1.27
  text "ML-P-55110F GRP" at 304.673,-14.494 h1.02
  text "A" at 322.961,-14.494 h1.27
  text "B" at 331.851,-14.494 h1.27
  text "IPC CLASS:" at 337.82,-14.494 h1.27
  text "1" at 353.314,-14.494 h1.27
  text "2" at 359.664,-14.494 h1.27
  text "3" at 366.014,-14.494 h1.27
  text "QUALITY RELEASE REPORT" at 305.181,-17.542 h1.27
  text "OTHER" at 345.694,-17.542 h1.27
  text "PER ORDER" at 354.203,-17.669 h1.27
  text "X" at 343.027,-17.796 h1.52
  text "NONE" at 305.181,-20.59 h1.27
  text "REQUIRED" at 322.961,-20.59 h1.27
  text "PER ORDER" at 345.821,-20.59 h1.27
  text "ELECTRICAL TEST:" at 261.62,-20.717 h1.52
  text "X" at 320.294,-20.717 h1.52
  text "NONE" at 305.181,-23.638 h1.27
  text "1 SIDE" at 322.834,-23.638 h1.14
  text "2 SIDES" at 334.01,-23.638 h1.14
  text "MIN. PITCH" at 345.694,-23.638 h1.27
  text "0.65mm" at 359.283,-23.638 h1.27
  text "SURFACE MOUNT:" at 261.62,-23.765 h1.52
  text "X" at 331.775,-23.841 h1.52
  text "NONE" at 305.181,-26.686 h1.27
  text "FOIL" at 322.961,-26.686 h1.27
  text "LEGEND" at 334.391,-26.686 h1.27
  text "REFER" at 345.694,-26.686 h1.27
  text "MANUFACTURER'S ID/LOGO:" at 261.62,-26.813 h1.52
  text "X" at 302.514,-26.94 h1.52
  text "ISO9001/AS3901" at 308.991,-29.734 h1.27
  text "NONE" at 345.694,-29.734 h1.27
  text "MANUFACTURER'S ACCREDITATION:" at 261.62,-29.861 h1.52
  text "X" at 306.324,-29.861 h1.52
  text "PER ORDER" at 305.181,-32.782 h1.27
  text "REFER" at 322.961,-32.782 h1.27
  text "PACKAGING AND HANDLING:" at 261.62,-32.909 h1.52
  text "X" at 302.514,-33.036 h1.52
Sheet:
  drawing of 1882 lines, arcs and shapes, not listed
  text "1" at 3.717,207.391 h1.78
  text "2" at 52.756,207.391 h1.78
  text "3" at 102.015,207.391 h1.78
  text "4" at 151.308,207.391 h1.78
  text "5" at 200.584,207.391 h1.78
  text "6" at 249.606,207.391 h1.78
  text "7" at 299.136,207.391 h1.78
  text "8" at 348.158,207.391 h1.78
  text "A" at -18.415,173.406 h1.78
  text "A" at 370.205,173.406 h1.78
  text "B" at -18.415,102.794 h1.78
  text "B" at 370.205,102.794 h1.78
  text "C" at -18.415,32.182 h1.78
  text "C" at 370.205,32.182 h1.78
  text "D" at -18.415,-37.922 h1.78
  text "D" at 370.205,-37.922 h1.78
  text "ENGINEER:" at 255.27,-38.1 h1.14
  text "TITLE:" at 293.37,-38.1 h1.14
  text "PCB DESIGNER:" at 255.27,-45.593 h1.14
  text "DATE:" at 255.27,-53.34 h1.14
  text "PART NO.:" at 293.37,-53.34 h1.14
  text "REV:" at 346.71,-53.34 h1.14
  text "Altium Limited" at 222.25,-55.88 h1.78
  text ".PRINT_DATE" at 256.54,-56.388 h1.78
  text "12a Rodborough Rd" at 222.25,-58.42 h1.78
  text "Frenchs Forest" at 222.25,-60.96 h1.78
  text "FILE NAME:" at 255.27,-60.96 h1.14
  text "DWG NO:" at 293.37,-60.96 h1.14
  text "SCALE:" at 346.71,-60.96 h1.14
  text "NSW 2086" at 222.25,-63.5 h1.78
  text ".PCB_FILE_NAME_NO_PATH" at 256.54,-64.008 h1.78
  text "1" at 3.717,-69.469 h1.78
  text "2" at 52.756,-69.469 h1.78
  text "3" at 102.015,-69.469 h1.78
  text "4" at 151.308,-69.469 h1.78
  text "5" at 200.584,-69.469 h1.78
  text "6" at 249.606,-69.469 h1.78
  text "7" at 299.136,-69.469 h1.78
  text "8" at 348.158,-69.469 h1.78
Drill Drawing:
  text ".Legend" at 0,-8 h0.75

## Dimensions
34.5,-69.801 to 34.5,84 on Dimensions
0.001,0.001 to 0.001,77 on Dimensions
0.001,0.001 to 68.999,0.001 on Dimensions